# EAGLE board MicrocontrollerV2 (EAGLE 9.5.1)
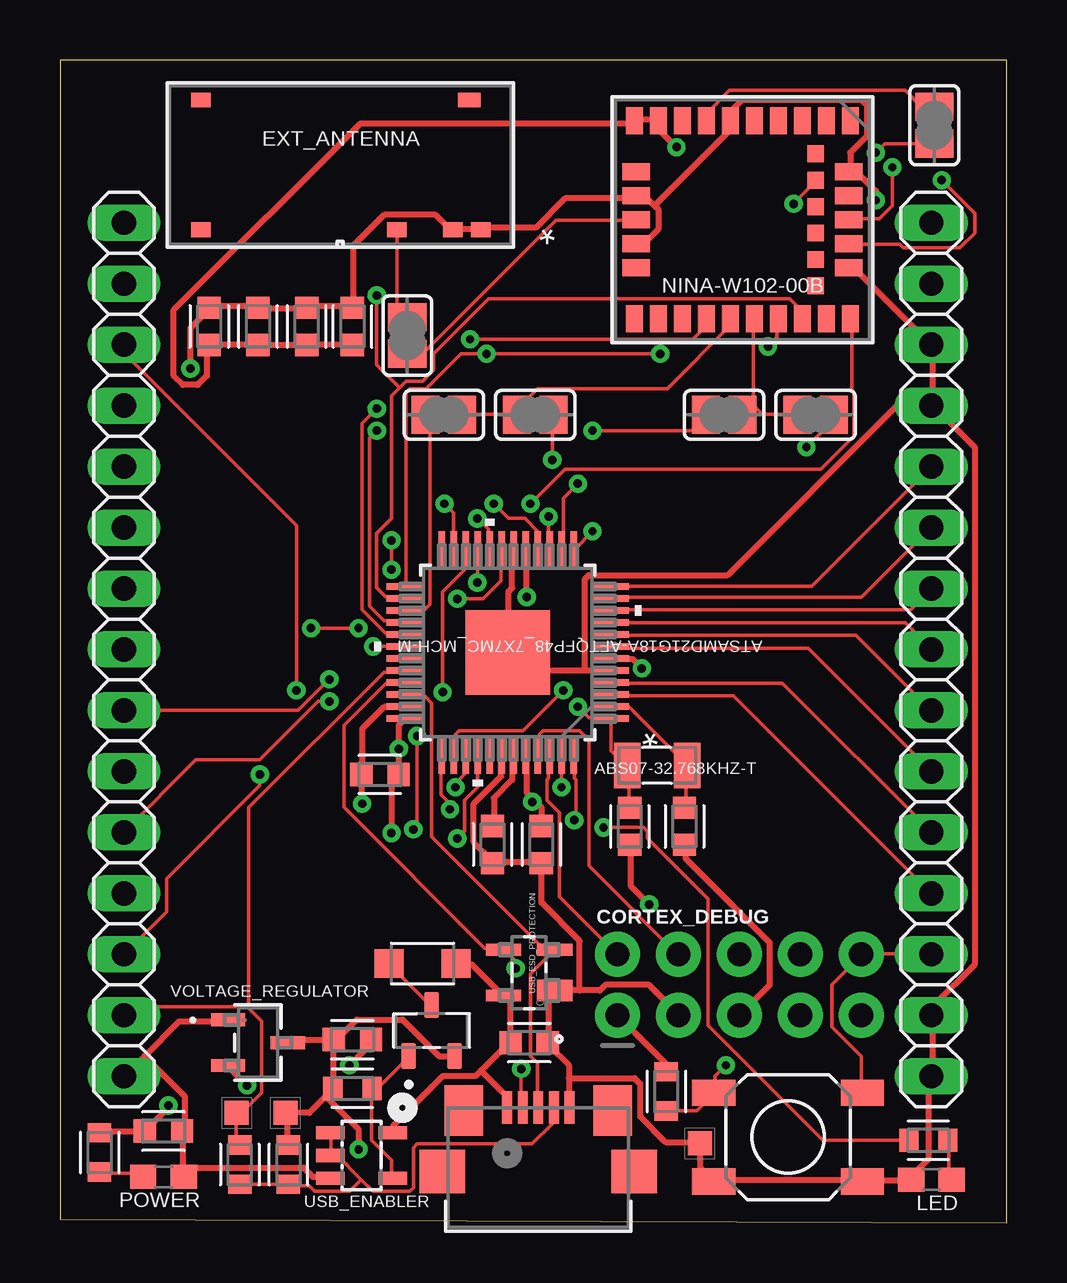
[diagram p0: board, top side]
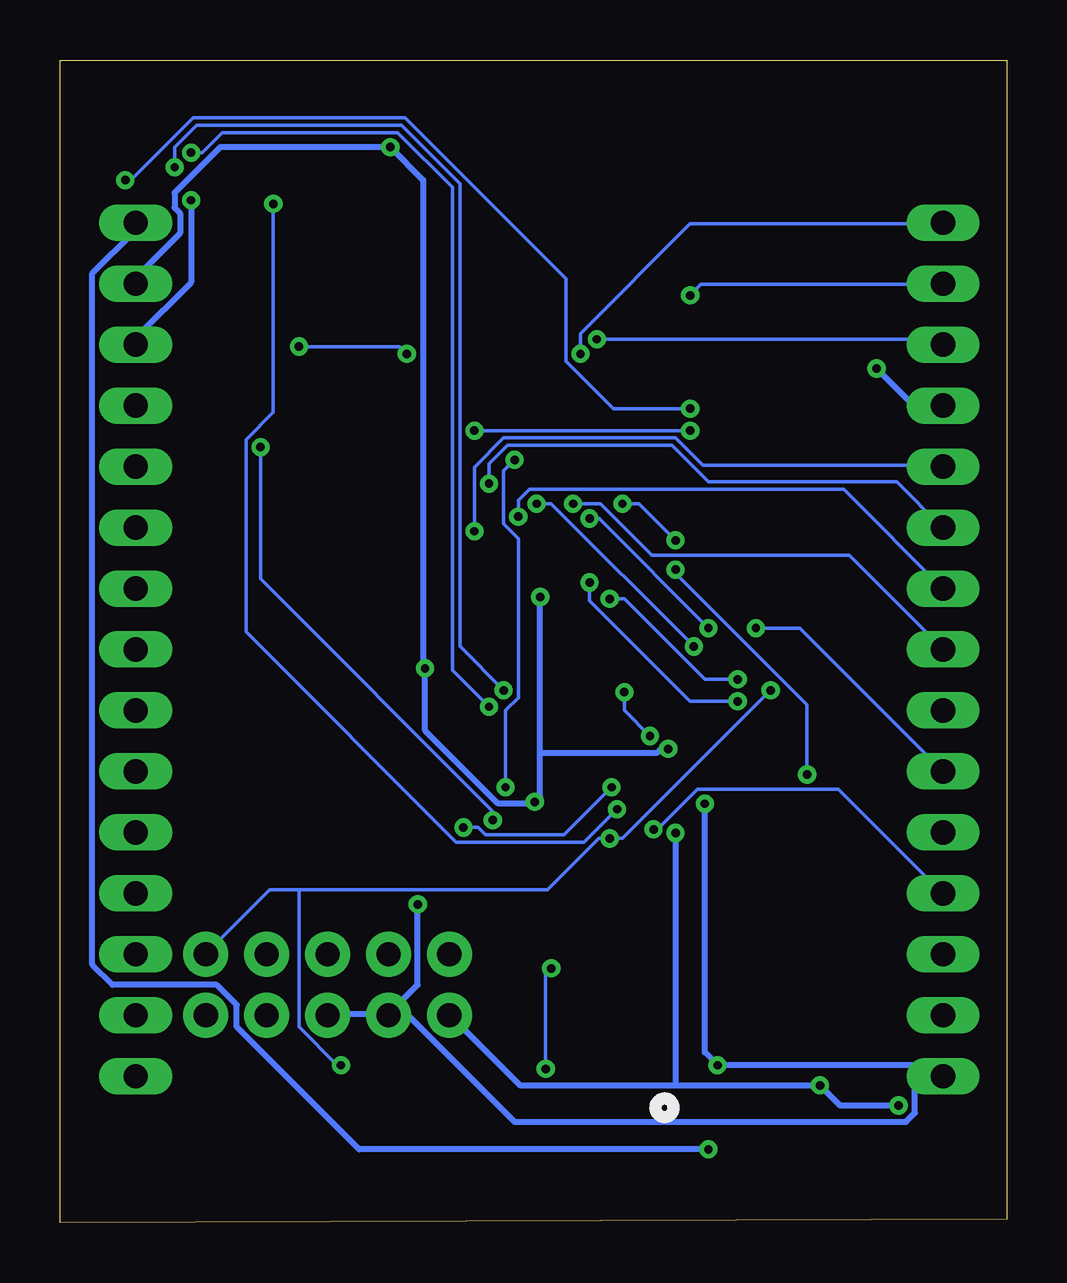
[diagram p1: board, bottom side, seen from below]

Size 39.48 x 48.44 mm. Coordinates in mm from the lower left corner, seen from the top.
Outline: 0,0.13 39.48,0 39.48,48.44 0,48.44 0,0.13
Copper layers (1*16): Top 0.035mm / dielectric 1.5mm / Bottom 0.035mm
Design rules "default": minimum track width 6mil, minimum drill 0.35mm, track to track 6mil, track to pad 6mil, pad to pad 6mil, via to via 6mil, smd to smd 6mil, copper to edge 40mil, drill to drill 6mil, minimum pad ring 10mil, minimum via ring 8mil, stop-mask expansion 4mil, vias tented up to drill 0mil, thermal gap 10mil
Net classes: 1 Supply: width 0.254 mm

## Footprints (pad centres in the part's own frame; a part is rotated, then mirrored left to right if it is on the bottom)
ABS07-32.768KHZ-T = smd 1.1 x 1.9: 1 -1.25,0; 2 1.25,0
CAPC1608X85 = smd 0.921 x 0.97: 1 -0.775,0; 2 0.775,0
2X5_NOSILK = drill 1.016 pad 1.88: 1 0,0; 2 0,2.54; 3 2.54,0; 4 2.54,2.54; 5 5.08,0; 6 5.08,2.54; 7 7.62,0; 8 7.62,2.54; 9 10.16,0; 10 10.16,2.54
SOD123W = smd 1.2 x 1.2: 1 -1.4,0; 2 1.4,0
PRO-OB-536_PAB = smd 0.813 x 0.61: 1 -5.85,2.702; 2 -4.7,2.702; 3 -2.36,2.702; 4 5.8,2.702; 5 5.8,-2.698 | smd 0.94 x 0.61: 6 -5.385,-2.698
TESTPOINT_SMD-10SN = smd 1 x 1: TP 0,0
1X15 = drill 1.016 long: 1 -17.78,0; 2 -15.24,0; 3 -12.7,0; 4 -10.16,0; 5 -7.62,0; 6 -5.08,0; 7 -2.54,0; 8 0,0; 9 2.54,0; 10 5.08,0; 11 7.62,0; 12 10.16,0; 13 12.7,0; 14 15.24,0; 15 17.78,0
0603 = smd 1.1 x 1: 1 -0.85,0; 2 0.85,0
CONN5_ZX62-AB-5PA_HIR = smd 0.406 x 1.346: 1 -1.3,2.502; 2 -0.65,2.502; 3 0,2.502; 4 0.65,2.502; 5 1.3,2.502 | smd 1.6 x 2.108: 6 -3.099,2.375; 7 3.099,2.375 | smd 1.905 x 1.803: 8 -4,-0.165; 9 4,-0.165
SOT96P240X110-3N = smd 1.09 x 0.61: 1 -1.07,0.96; 2 -1.07,-0.96; 3 1.07,0
RESC1608X60 = smd 0.799 x 0.974: 1 -0.815,0; 2 0.815,0
SM08 = smd 1.8 x 1.1: 1 -3.1,1.85; 2 3.1,1.85; 3 -3.1,-1.85; 4 3.1,-1.85
SJ = smd 1.168 x 1.6: 1 -0.762,0; 2 0.762,0
TQFP48_7X7MC_MCH-M = smd 1.549 x 0.279: 1 -4.28,2.75; 2 -4.28,2.25; 3 -4.28,1.75; 4 -4.28,1.25; 5 -4.28,0.75; 6 -4.28,0.25; 7 -4.28,-0.25; 8 -4.28,-0.75; 9 -4.28,-1.25; 10 -4.28,-1.75; 11 -4.28,-2.25; 12 -4.28,-2.75; 25 4.28,-2.75; 26 4.28,-2.25; 27 4.28,-1.75; 28 4.28,-1.25; 29 4.28,-0.75; 30 4.28,-0.25; 31 4.28,0.25; 32 4.28,0.75; 33 4.28,1.25; 34 4.28,1.75; 35 4.28,2.25; 36 4.28,2.75 | smd 0.279 x 1.549: 13 -2.75,-4.28; 14 -2.25,-4.28; 15 -1.75,-4.28; 16 -1.25,-4.28; 17 -0.75,-4.28; 18 -0.25,-4.28; 19 0.25,-4.28; 20 0.75,-4.28; 21 1.25,-4.28; 22 1.75,-4.28; 23 2.25,-4.28; 24 2.75,-4.28; 37 2.75,4.28; 38 2.25,4.28; 39 1.75,4.28; 40 1.25,4.28; 41 0.75,4.28; 42 0.25,4.28; 43 -0.25,4.28; 44 -0.75,4.28; 45 -1.25,4.28; 46 -1.75,4.28; 47 -2.25,4.28; 48 -2.75,4.28 | smd 3.505 x 3.505: EPAD 0,0
QFN_W151-00B_UBL = smd 1.143 x 0.711: 1 -4.125,4.5; 2 -4.125,3.5; 3 -4.125,2.5; 4 -4.125,1.5; 5 -4.125,0.5; 6 -4.125,-0.5; 7 -4.125,-1.5; 8 -4.125,-2.5; 9 -4.125,-3.5; 10 -4.125,-4.5; 16 4.125,-4.5; 17 4.125,-3.5; 18 4.125,-2.5; 19 4.125,-1.5; 20 4.125,-0.5; 21 4.125,0.5; 22 4.125,1.5; 23 4.125,2.5; 24 4.125,3.5; 25 4.125,4.5 | smd 0.711 x 1.143: 11 -2,-4.425; 12 -1,-4.425; 13 0,-4.425; 14 1,-4.425; 15 2,-4.425; 26 2,4.425; 27 1,4.425; 28 0,4.425; 29 -1,4.425; 30 -2,4.425 | smd 0.701 x 0.701: 31 -2.746,3.055; 32 -1.646,3.055; 33 -0.546,3.055; 34 0.554,3.055; 35 1.654,3.055; 36 2.754,3.055
SOT23-5L = smd 0.55 x 1.2: 1 -0.95,-1.3; 2 0,-1.3; 3 0.95,-1.3; 4 0.95,1.3; 5 -0.95,1.3
SOT143B_NEX-M = smd 0.889 x 1.473: 1 -0.747,-1.067 | smd 0.483 x 1.473: 2 0.95,-1.067; 3 0.95,1.067; 4 -0.95,1.067
SOT-23_TOR-M = smd 0.533 x 1.422: 1 -0.95,-1.245; 2 0.95,-1.245; 3 0,1.245

## Placement (x,y rotation side)
ABS07-32.768KHZ-T  32.768KHz  [ABS07-32.768KHZ-T]  24.89,19.05 180 top
C1  4.7uF  [CAPC1608X85]  19.56,7.49 0 top
C4  10uF  [CAPC1608X85]  12.19,7.62 180 top
C5  10uF  [CAPC1608X85]  4.32,3.81 0 top
C10  100nF  [CAPC1608X85]  10.29,37.34 270 top
C11  12pF  [CAPC1608X85]  23.75,16.51 90 top
C12  12pF  [CAPC1608X85]  26.04,16.51 90 top
C13  1uF  [CAPC1608X85]  18.03,15.75 90 top
C14  100nF  [CAPC1608X85]  20.07,15.75 90 top
C15  100nF  [CAPC1608X85]  13.33,18.67 0 top
C16  100nF  [CAPC1608X85]  6.22,37.34 90 top
C17  100nF  [CAPC1608X85]  8.25,37.34 270 top
C18  4.7uF  [CAPC1608X85]  12.19,37.34 270 top
CORTEX_DEBUG  [2X5_NOSILK]  23.24,8.64 0 top
D1  PMEG6020ER  [SOD123W]  15.11,10.8 0 top
EXT_ANTENNA  PRO-OB-536  [PRO-OB-536_PAB]  11.68,44.07 180 top
GND  TESTPOINT_TPS-SMD-10SN  [TESTPOINT_SMD-10SN]  26.67,3.3 0 top
JP1  [1X15]  36.32,23.88 270 top
JP2  [1X15]  2.67,23.88 270 top
LED  HSMR-C190  [0603]  36.32,1.78 0 top
MICRO-USB  ZX62-AB-5PA(31)  [CONN5_ZX62-AB-5PA_HIR]  19.94,2.29 0 top
POWER  HSMR-C190  [0603]  4.32,1.91 180 top
Q1  DMG2307L  [SOT96P240X110-3N]  15.49,8 90 top
R1  100K  [RESC1608X60]  9.52,2.41 270 top
R2  330  [RESC1608X60]  7.49,2.41 90 top
R3  47k  [RESC1608X60]  12.19,5.59 0 top
R4  330  [RESC1608X60]  1.65,2.92 90 top
R5  330  [RESC1608X60]  36.2,3.43 180 top
R7  10K  [RESC1608X60]  25.27,5.46 90 top
S1  [SM08]  30.35,3.56 0 top
SJ1  [SJ]  14.48,36.96 90 top
SJ2  [SJ]  36.45,45.72 90 top
SJ3  [SJ]  27.69,33.65 0 top
SJ4  [SJ]  16,33.65 0 top
SJ5  [SJ]  31.5,33.65 180 top
SJ6  [SJ]  19.81,33.65 180 top
U1  ATSAMD21G18A-AFTQFP48_7X7MC_MCH-M  [TQFP48_7X7MC_MCH-M]  18.67,23.75 180 top
U2  NINA-W102-00B  [QFN_W151-00B_UBL]  28.45,41.78 270 top
USB_EN  TESTPOINT_TPS-SMD-10SN  [TESTPOINT_SMD-10SN]  7.37,4.57 0 top
USB_ENABLER  74AHC1G125  [SOT23-5L]  12.57,2.79 270 top
USB_ESD_PROTECTION  PRTR5V0U2XSOT143B_NEX-M  [SOT143B_NEX-M]  19.56,10.41 90 top
VIN  TESTPOINT_TPS-SMD-10SN  [TESTPOINT_SMD-10SN]  9.4,4.57 0 top
VOLTAGE_REGULATOR  XC6206P332MR-GSOT-23_TOR-M  [SOT-23_TOR-M]  8.25,7.49 270 top

## Library data of the parts
ABS07-32.768KHZ-T = Crystals; CREATED_BY: PCBLayout.com; DIGIKEY_PART_NUMBER: 535-9542-2-ND; MANUFACTURER: Abracon LLC; MPN: ABS07-32.768KHZ-T; PACKAGE: SMD-2
C1 C4 C5 C10-C18 = Capacitor; CATEGORY: Capacitor
CORTEX_DEBUG = SparkFun-Connectors
D1 = nxp_60_1_1
EXT_ANTENNA = PRO-OB-536 [SMD Antenna]; BUILT_BY: EMA_Cory; COPYRIGHT: Copyright (C) 2018 Accelerated Designs. All rights reserved; MANUFACTURER_PART_NUMBER: PRO-OB-536; SOURCELIBRARY: Proant_2019-12-18; VENDOR: PROANT AB
GND USB_EN VIN = 52101-101-REV-A; BOM: EXCLUDE
JP1 JP2 = adafruit
LED POWER = HSMR-C190; AVAILABILITY: Unavailable; DESCRIPTION: Blue 473nm LED Indication - Discrete 3.4V 0603 (1608 Metric); MF: Broadcom Limited; MP: HSMR-C190; PACKAGE: 0603 Broadcom; PRICE: None
MICRO-USB = ZX62-AB-5PA(31) [Micro-USB 2.0]; BUILT_BY: EMA_Justin; COPYRIGHT: Copyright (C) 2016 Accelerated Designs. All rights reserved; MANUFACTURER_PART_NUMBER: ZX62-AB-5PA(31); SOURCELIBRARY: Hirose_2018-12-15; VENDOR: Hirose
Q1 = DMG2307L; AVAILABILITY: Unavailable; DESCRIPTION: P-Channel 30V 2.5A (Ta) 760mW (Ta) Surface Mount SOT-23; MF: Diodes Inc.; MP: DMG2307L; PACKAGE: SOT-23-3 Diodes Inc.; PRICE: None
R1-R5 R7 = Resistor; CATEGORY: Resistor; SUB-CATEGORY: Fixed
S1 = pts525_10 [reset switch]; MF: C&K Components; MPN: PTS525SK08SMTRLFS; OC_FARNELL: unknown; OC_NEWARK: unknown
SJ1-SJ6 = jumper
U1 = ATSAMD21G18A-AF; BUILT_BY: EMA_Molly; COPYRIGHT: Copyright (C) 2018 Accelerated Designs. All rights reserved; MANUFACTURER_PART_NUMBER: ATSAMD21G18A-AF; SOURCELIBRARY: Microchip_2019-08-23_25; VENDOR: Microchip
U2 = NINA-W102; BUILT_BY: EMA_Matt; COPYRIGHT: Copyright (C) 2018 Accelerated Designs. All rights reserved; DATASHEET: https://www.u-blox.com/sites/default/files/NINA-W15_DataSheet_%28UBX-18006647%29.pdf; MANUFACTURER_PART_NUMBER: NINA-W102-00B; SOURCELIBRARY: Ublox_2020-01-16; VENDOR: Ublox
USB_ENABLER = 74AHC1G125; AVAILABILITY: Unavailable; DESCRIPTION: Buffer, Non-Inverting 1 Element 1 Bit per Element 3-State Output SOT-23-5; MF: Texas Instruments; MP: 74AHC1G125; PACKAGE: SOT-23 Texas Instruments; PRICE: None
USB_ESD_PROTECTION = PRTR5V0U2X; COPYRIGHT: Copyright (C) 2016 Accelerated Designs. All rights reserved; MANUFACTURER_PART_NUMBER: PRTR5V0U2X; SOURCELIBRARY: Nexperia_2018-05-2018; VENDOR: Nexperia
VOLTAGE_REGULATOR = XC6206P332MR (SOT-23) [Vin to 3.3V]; BUILT_BY: EMA_UL_Team; MANUFACTURER_PART_NUMBER: XC6206P332MR-G; SOURCELIBRARY: Torex_2016-07-05_2; VENDOR: Torex Semiconductor

## Nets
3V3+ [Supply]: C5.1 C10.2 C14.2 C15.2 C16.1 C17.2 C18.2 CORTEX_DEBUG.1 JP1.2 R4.2 R7.2 U1.6 U1.17 U1.36 U1.44 U2.9 U2.10 VOLTAGE_REGULATOR.2
25_BOOT_MODE: U1.30 U2.25
27_BOOT_MODE: U1.29 U2.27
28_TIMING_OUT: U1.38 U2.28
32_TIMING_IN: U1.37 U2.32
A0: JP1.12 U1.3
A1: JP1.11 U1.4
A2: JP1.10 U1.7
A3: JP1.9 U1.8
A4: JP1.8 U1.9
A5: JP1.7 U1.10
A6: JP1.6 U1.11
A7: JP1.5 U1.12
ANT: EXT_ANTENNA.3 SJ1.2
D0: JP2.5 U1.13
D1: JP2.6 U1.14
D2: JP2.7 U1.15
D3: JP2.8 U1.16
D4: JP2.9 U1.19
D5: JP2.10 U1.20
D6: JP2.11 U1.21
D7: JP2.12 U1.22
D8: JP2.13 U1.23
EXT_ANT: SJ1.1 U2.13
EXT_OSC: SJ2.2 U2.7
GND [Supply]: C1.2 C4.1 C5.2 C10.1 C11.1 C12.1 C13.1 C14.1 C15.1 C16.2 C17.1 C18.1 CORTEX_DEBUG.3 CORTEX_DEBUG.5 EXT_ANTENNA.1 EXT_ANTENNA.2 GND.TP JP1.3 JP1.4 JP1.14 JP1.15 JP2.4 JP2.15 LED.1 MICRO-USB.5 POWER.1 S1.3 S1.4 U1.5 U1.18 U1.35 U1.42 U1.EPAD U2.6 U2.12 U2.14 U2.26 U2.30 USB_ENABLER.3 USB_ESD_PROTECTION.1 VOLTAGE_REGULATOR.1
LED: R5.2 U1.39
N$1: LED.2 R5.1
N$3: POWER.2 R4.1
N$6: D1.1 Q1.3
N$8: Q1.1 R3.2 USB_ENABLER.4
PA00: ABS07-32.768KHZ-T.2 C11.2 SJ2.1 U1.1
PA01: ABS07-32.768KHZ-T.1 C12.2 U1.2
RESETN: CORTEX_DEBUG.10 JP1.13 JP2.3 R7.1 S1.1 S1.2 U1.40 U2.19
SWCLK: CORTEX_DEBUG.4 U1.45
SWDIO: CORTEX_DEBUG.2 U1.46
UART_CTS: SJ3.2 SJ5.2 U2.21
UART_CTS_A: SJ5.1 U1.48
UART_CTS_D: SJ3.1 U1.28
UART_RTS: SJ4.2 SJ6.2 U2.20
UART_RTS_A: SJ6.1 U1.47
UART_RTS_D: SJ4.1 U1.27
UART_RX: JP2.2 U1.26 U2.23
UART_TX: JP2.1 U1.25 U2.22
USB_EN: JP2.14 R2.2 U1.32 USB_EN.TP
USB_ID: MICRO-USB.4 R1.2 R2.1 USB_ENABLER.1 USB_ENABLER.2
USB_N: MICRO-USB.2 U1.33 USB_ESD_PROTECTION.3
USB_P: MICRO-USB.3 U1.34 USB_ESD_PROTECTION.2
VBUS [Supply]: C1.1 D1.2 MICRO-USB.1 USB_ENABLER.5 USB_ESD_PROTECTION.4
VDDCORE [Supply]: C13.2 U1.43
VIN [Supply]: C4.2 JP1.1 Q1.2 R1.1 R3.1 VIN.TP VOLTAGE_REGULATOR.3

## Tracks (layer width: path | path; a pad name or v marks a point on that pad's centre or on a via)
3V3+  (via drill 0.35)
  Top 0.254: R4.2 1.7,3.81 C5.1 3.61,3.89 4.52,4.8 v4.52,4.88 | CORTEX_DEBUG.1 25.25,6.63 25.25,6.33 R7.2 | v7.8,5.72 7.04,6.48 VOLTAGE_REGULATOR.2 | U1.36 14.35,20.96 14.12,20.73 v14.12,19.74 C15.2 14.05,18.59 13.82,18.36 v13.82,16.23 | C14.2 20.07,17.3 19.76,17.6 | 19.76,17.6 19.46,17.91 19.46,19.43 U1.44 | v24.26,23.09 23.88,23.47 22.96,23.47 U1.6 | v19.69,17.53 19.76,17.6 | v19.46,26.06 19.46,27.96 U1.17 | C18.2 12.14,36.58 10.31,36.58 C10.2 10.16,36.58 8.33,36.58 C17.2 6.27,36.58 C16.1 6.12,36.5 6.12,35.28 5.74,34.9 5.13,34.9 4.75,35.28 4.75,38.02 12.52,45.8 23.88,45.8 U2.10 23.95,45.95 24.94,45.95 U2.9 25.02,45.8 25.02,45.49 v25.71,44.81
  Bottom 0.254: 13.82,5.72 20.3,5.72 23.19,8.61 CORTEX_DEBUG.1 | 13.82,5.72 v7.8,5.72 6.96,4.88 v4.52,4.88 | 19.46,19.58 19.46,17.76 v19.69,17.53 19.76,17.45 21.21,17.45 24.26,20.5 v24.26,23.09 24.33,23.16 24.33,43.43 v25.71,44.81 32.79,44.81 34.7,42.9 34.7,42.29 34.47,42.06 34.47,41.22 36.3,39.39 36.3,39.17 JP1.2 | 19.46,19.58 v19.46,26.06 | v14.12,19.74 14.43,19.74 14.58,19.58 19.46,19.58 | v13.82,16.23 13.82,5.72
25_BOOT_MODE  (via drill 0.35)
  Top 0.152: v19.61,29.95 21.06,31.39 31.73,31.39 33.1,32.77 33.1,34.59 33.02,34.67 33.02,37.64 U2.25 | v13.06,24 14.35,24 U1.30
  Bottom 0.152: v19.61,29.95 19,29.95 v13.06,24
27_BOOT_MODE  (via drill 0.35)
  Top 0.152: v36.75,43.43 38.12,42.06 38.12,41.22 37.52,40.61 35.15,40.61 35,40.77 32.94,40.77 U2.27 | v13.21,33.91 12.6,33.3 12.6,25.53 13.59,24.54 14.35,24.54 U1.29
  Bottom 0.152: v36.75,43.43 36.52,43.43 33.93,46.02 25.1,46.02 18.39,39.32 18.39,35.89 16.41,33.91 v13.21,33.91
28_TIMING_OUT  (via drill 0.35)
  Top 0.152: v34.7,43.97 34.7,42.37 34.16,41.83 32.94,41.83 U2.28 | v20.98,22.17 19.3,20.5 16.64,20.5 16.48,20.35 16.48,19.51 U1.38
  Bottom 0.152: v34.7,43.97 34.7,44.81 33.78,45.72 25.25,45.72 22.81,43.28 22.81,24 v20.98,22.17
32_TIMING_IN  (via drill 0.35)
  Top 0.152: v30.58,42.44 31.5,43.36 U2.32 | v16.26,17.22 16.26,17.45 15.87,17.83 15.87,19.43 U1.37
  Bottom 0.152: v30.58,42.44 30.58,33.76 31.73,32.61 31.73,24.61 22.96,15.85 17.63,15.85 v16.26,17.22
A0
  Top 0.152: U1.3 22.96,21.95 28.07,21.95 36.3,13.72 JP1.12
A1
  Top 0.152: U1.4 22.96,22.48 30.12,22.48 36.3,16.31 JP1.11
A2
  Top 0.152: JP1.10 31.19,23.93 22.96,23.93 U1.7
A3
  Top 0.152: U1.8 22.96,24.46 33.17,24.46 36.3,21.34 JP1.9
A4
  Top 0.152: U1.9 35.23,24.99 36.3,23.93 JP1.8
A5
  Top 0.152: U1.10 22.96,25.53 35.46,25.53 36.3,26.37 JP1.7
A6
  Top 0.152: U1.11 22.96,26.06 33.4,26.06 36.3,28.96 JP1.6
A7
  Top 0.152: JP1.5 31.34,26.52 22.96,26.52 U1.12
ANT
  Top 0.152: EXT_ANTENNA.3 14.05,41.3 14.05,38.1 14.43,37.72 SJ1.2
D0  (via drill 0.35)
  Top 0.152: v22.2,28.8 21.44,28.04 U1.13
  Bottom 0.152: v22.2,28.8 22.2,31.47 20.98,32.69 13.82,32.69 12.67,31.55 2.69,31.55 JP2.5
D1  (via drill 0.35)
  Top 0.152: v21.59,30.79 20.98,30.18 20.98,28.04 U1.14
  Bottom 0.152: v21.59,30.79 21.59,31.62 20.83,32.38 13.97,32.38 12.45,30.86 4.6,30.86 2.69,28.96 JP2.6
D2  (via drill 0.35)
  Top 0.152: v20.37,29.41 20.37,28.04 U1.15
  Bottom 0.152: v20.37,29.41 20.37,30.1 19.91,30.56 6.81,30.56 JP2.7
D3  (via drill 0.35)
  Top 0.152: v18.09,29.95 18.69,29.34 19.38,29.34 19.91,28.8 19.91,28.04 U1.16
  Bottom 0.152: v18.09,29.95 16.94,29.95 14.81,27.81 6.58,27.81 2.69,23.93 JP2.8
D4  (via drill 0.35)
  Top 0.152: v16.56,25.98 17.63,25.98 18.39,26.75 18.39,27.96 U1.19 | v11.23,22.63 9.93,21.34 JP2.9
  Bottom 0.152: v16.56,25.98 15.95,25.98 12.6,22.63 v11.23,22.63
D5  (via drill 0.35)
  Top 0.152: v17.4,29.34 17.86,28.88 17.86,28.04 U1.20 | v10.46,24.77 v12.45,24.77
  Bottom 0.152: v17.4,29.34 17.02,29.34 v12.45,24.77 | v10.46,24.77 8.64,24.77 JP2.10
D6  (via drill 0.35)
  Top 0.152: v17.4,26.67 17.4,27.96 U1.21 | v11.23,21.72 10.77,21.72 8.33,19.28 5.66,19.28 2.69,16.31 JP2.11
  Bottom 0.152: v17.4,26.67 17.4,25.91 13.21,21.72 v11.23,21.72
D7  (via drill 0.35)
  Top 0.152: v15.95,22.1 15.95,26.29 16.87,27.2 16.87,27.96 U1.22 | v14.88,20.27 14.88,16.54 v14.73,16.38
  Bottom 0.152: v15.95,22.1 15.95,21.34 v14.88,20.27 | v14.73,16.38 14.58,16.38 12.9,18.06 7.04,18.06 2.69,13.72 JP2.12
D8  (via drill 0.35)
  Top 0.152: v16.03,29.95 16.41,29.57 16.41,28.04 U1.23 | v13.82,27.2 v13.82,28.42 | v8.33,18.67 8.33,18.21 4.45,14.33 4.45,12.95 JP2.13
  Bottom 0.152: v16.03,29.95 15.34,29.95 v13.82,28.42 | v13.82,27.2 13.82,27.05 8.33,21.57 v8.33,18.67
EXT_ANT
  Top 0.152: SJ1.1 15.11,36.2 20.68,41.76 23.95,41.76 U2.13
EXT_OSC
  Top 0.152: U2.7 27,45.95 27,46.25 27.92,47.17 35.23,47.17 35.92,46.48 SJ2.2
GND  (via drill 0.35)
  Top 0.254: USB_ENABLER.3 11.23,1.91 10.54,1.91 10.16,2.29 5.21,2.29 POWER.1 5.13,1.91 5.13,3.81 C5.2 5.21,3.89 5.21,5.26 3.53,6.93 | U1.35 14.35,21.49 13.51,21.49 12.6,20.57 12.6,18.67 C15.1 12.6,18.59 v12.6,17.45 | v12.06,6.55 12.9,7.39 12.9,7.62 C4.1 | 3.53,6.93 2.69,6.1 JP2.15 | 3.53,6.93 4.98,8.38 6.96,8.38 VOLTAGE_REGULATOR.1 | CORTEX_DEBUG.5 29.59,9.91 29.59,11.66 26.09,15.16 26.09,15.7 C12.1 | U1.42 18.39,19.43 18.39,18.59 17.25,17.45 17.25,15.85 18.01,15.09 C13.1 18.09,15.01 20.07,15.01 C14.1 20.07,13.34 21.67,11.73 21.67,9.68 | 21.21,6.02 21.21,6.55 20.37,7.39 C1.2 20.37,7.54 20.37,9.37 20.6,9.6 USB_ESD_PROTECTION.1 20.75,9.68 21.67,9.68 | 21.21,6.02 21.21,4.8 MICRO-USB.5 | v24.56,13.26 23.8,14.02 23.8,15.7 C11.1 | 21.67,9.68 22.5,9.68 22.73,9.91 24.56,9.91 25.78,8.69 CORTEX_DEBUG.3 | 21.21,6.02 23.95,6.02 24.18,5.79 24.18,4.42 25.25,3.35 26.62,3.35 GND.TP 26.7,3.28 26.7,2.29 27.23,1.75 S1.3 27.3,1.75 33.4,1.75 S1.4 33.48,1.75 35.46,1.75 LED.1 35.46,1.91 36.22,2.67 36.22,6.02 JP1.15 36.37,6.1 36.37,8.61 JP1.14 36.45,8.69 36.45,9.07 38.12,10.74 38.12,32.31 36.45,33.98 JP1.4 | U2.26 32.94,39.78 33.1,39.78 36.3,36.58 JP1.3 36.37,36.5 36.37,34.06 JP1.4 | U1.18 18.85,27.96 18.85,26.44 18.69,26.29 18.69,23.77 U1.EPAD 18.77,23.7 19.46,23.01 21.89,23.01 | 21.89,23.01 22.89,23.01 U1.5 | 21.89,23.01 21.89,26.82 22.05,26.98 27.84,26.98 34.85,33.98 36.22,33.98 JP1.4 | 24.79,42.37 24.41,42.75 24.03,42.75 U2.12 23.95,42.67 21.06,42.67 19.84,41.45 17.63,41.45 EXT_ANTENNA.1 17.48,41.38 16.41,41.38 EXT_ANTENNA.2 16.26,41.38 15.65,41.99 13.51,41.99 12.22,40.69 12.22,38.25 C18.1 12.14,38.18 10.31,38.18 C10.1 10.16,38.1 8.33,38.1 C17.1 8.25,38.18 6.27,38.18 C16.2 6.2,38.02 5.44,37.26 v5.44,35.58
  Top 0.254: 24.79,42.37 24.94,42.21 24.94,41.38 24.41,40.84 24.03,40.84 U2.14 | 24.79,42.37 27.92,45.49 27.92,45.87 U2.6 27.99,46.02 27.99,46.33 28.45,46.79 33.4,46.79 33.63,46.56 33.63,45.26 32.94,44.58 32.94,43.81 U2.30 33.02,43.74 33.25,43.74 34.01,42.98 v34.01,42.6
  Bottom 0.254: v12.6,17.45 12.6,7.09 v12.06,6.55 3.15,6.55 2.69,6.1 JP2.15 3.83,6.48 3.83,4.57 4.22,4.19 20.52,4.19 25.32,8.99 CORTEX_DEBUG.3 | v24.56,13.26 24.56,9.91 25.78,8.69 CORTEX_DEBUG.3 | CORTEX_DEBUG.5 28.3,8.69 25.86,8.69 CORTEX_DEBUG.3 | v5.44,35.58 3.91,34.06 2.69,34.06 JP2.4 | v34.01,42.6 34.01,39.17 36.3,36.88 36.3,36.58 JP1.3
LED  (via drill 0.35)
  Top 0.152: R5.2 31.8,3.43 27,8.23 27,13.49 24.49,16 24.49,16.31 24.33,16.46 v22.66,16.46 | v16.48,18.14 16.48,18.29 16.87,18.67 16.87,19.43 U1.39
  Bottom 0.152: v22.66,16.46 22.05,16.46 21.74,16.15 18.47,16.15 v16.48,18.14
N$1
  Top 0.152: R5.1 37.06,3.43 37.06,1.91 37.13,1.83 LED.2
N$3
  Top 0.152: R4.1 1.7,2.06 3.3,2.06 3.45,1.91 POWER.2
N$6
  Top 0.152: Q1.3 15.49,9.14 15.34,9.14 13.74,10.74 D1.1
N$8
  Top 0.152: Q1.1 14.5,6.86 13.28,5.64 13.06,5.64 R3.2 12.98,5.56 12.98,3.43 13.82,2.59 13.82,1.91 USB_ENABLER.4
PA00  (via drill 0.35)
  Top 0.152: C11.2 23.72,17.3 23.72,18.97 ABS07-32.768KHZ-T.2 23.57,19.05 22.96,19.66 22.96,20.96 U1.1 22.89,21.03 22.05,21.03 v21.59,21.49 | SJ2.1 34.39,44.96 v34.01,44.58
  Bottom 0.152: v34.01,44.58 33.55,44.58 32.71,45.41 25.4,45.41 23.11,43.13 23.11,23.01 v21.59,21.49
PA01
  Top 0.152: C12.2 26.09,17.3 26.09,19.05 ABS07-32.768KHZ-T.1 26.16,19.05 23.72,21.49 U1.2
RESETN  (via drill 0.35)
  Top 0.152: v17.09,36.8 26.39,36.8 26.92,37.34 26.92,37.64 U2.19 | R7.1 25.32,4.65 26.54,4.65 27.23,5.33 S1.1 27.3,5.41 27.3,6.1 v27.76,6.55 | v16.56,16 16.87,16.31 16.87,17.6 17.4,18.14 17.4,19.43 U1.40 | S1.2 33.4,5.41 33.4,6.93 32.18,8.15 32.18,9.91 33.4,11.12 CORTEX_DEBUG.10 33.4,11.2 36.3,11.2 JP1.13 | v9.85,22.17 9.85,29.03 2.69,36.2 2.69,36.58 JP2.3
  Bottom 0.152: v17.09,36.8 2.92,36.8 2.69,36.58 JP2.3 | 29.52,13.87 30.73,13.87 33.4,11.2 CORTEX_DEBUG.10 | 29.52,13.87 19.15,13.87 17.02,16 v16.56,16 16.03,16 v9.85,22.17 | v27.76,6.55 27.92,6.55 29.52,8.15 29.52,13.87
SWCLK
  Top 0.152: U1.45 19.99,19.51 19.99,20.35 20.14,20.5 21.67,20.5 22.05,20.12 22.05,14.86 25.78,11.12 CORTEX_DEBUG.4
SWDIO
  Top 0.152: U1.46 20.37,19.43 20.37,18.52 20.3,18.44 20.3,17.6 20.83,17.07 20.83,13.56 23.19,11.2 CORTEX_DEBUG.2
UART_CTS
  Top 0.152: U2.21 28.91,37.64 28.91,34.14 28.45,33.68 SJ3.2 28.91,34.06 29.29,33.68 30.73,33.68 SJ5.2
UART_CTS_A  (via drill 0.35)
  Top 0.152: v21.44,16.76 21.51,16.84 21.51,18.44 21.44,18.52 21.44,19.43 U1.48 | v31.12,32.31 32.26,33.45 SJ5.1
  Bottom 0.152: v21.44,16.76 21.44,17.14 31.12,26.82 v31.12,32.31
UART_CTS_D  (via drill 0.35)
  Top 0.152: v13.21,32.99 12.9,32.69 12.9,25.68 13.51,25.07 14.35,25.07 U1.28 | v22.2,32.99 26.31,32.99 26.92,33.6 SJ3.1
  Bottom 0.152: v22.2,32.99 v13.21,32.99
UART_RTS
  Top 0.152: U2.20 27.92,37.64 27.92,37.34 25.32,34.75 19.91,34.75 19.08,33.91 19.08,33.68 SJ6.2 19,33.68 16.79,33.68 SJ4.2
UART_RTS_A  (via drill 0.35)
  Top 0.152: v20.9,18.14 20.9,19.43 U1.47 | v20.52,31.78 20.52,33.6 SJ6.1
  Bottom 0.152: v20.9,18.14 20.9,21.34 20.37,21.87 20.37,28.5 20.98,29.11 20.98,31.32 v20.52,31.78
UART_RTS_D
  Top 0.152: U1.27 14.43,25.53 15.19,25.53 15.42,25.76 15.42,33.45 15.26,33.6 SJ4.1
UART_RX  (via drill 0.35)
  Top 0.152: 14.16,34.78 13.82,34.44 13.82,29.34 13.21,28.73 13.21,26.44 13.59,26.06 14.35,26.06 U1.26 | 14.16,34.78 14.43,35.05 15.11,35.05 15.57,35.51 15.57,36.2 17.86,38.48 30.43,38.48 30.89,38.02 30.89,37.72 U2.23 | v13.21,38.63 13.21,35.74 14.16,34.78
  Bottom 0.152: v13.21,38.63 12.75,39.09 2.69,39.09 JP2.2
UART_TX  (via drill 0.35)
  Top 0.152: v29.52,36.5 29.9,36.88 29.9,37.64 U2.22 | v25.02,36.2 v17.78,36.2 16.71,36.2 15.26,34.75 14.58,34.75 14.43,34.59 14.43,26.52 U1.25
  Bottom 0.152: v29.52,36.5 25.32,36.5 v25.02,36.2 | v17.78,36.2 17.78,37.03 13.21,41.6 2.69,41.6 JP2.1
USB_EN
  Top 0.152: R2.2 7.34,3.52 7.34,4.57 USB_EN.TP 7.57,4.57 8.41,5.41 8.41,8.38 7.84,8.95 | 7.84,8.95 7.8,8.99 3,8.99 2.69,8.69 JP2.14 | U1.32 14.35,22.94 13.51,22.94 7.87,17.3 7.87,8.99 7.84,8.95
USB_ID
  Top 0.152: R2.1 7.54,1.6 9.47,1.6 R1.2 9.55,1.52 10.39,1.52 10.62,1.29 12.06,1.29 12.56,1.79 | USB_ENABLER.1 11.3,3.73 11.3,2.82 USB_ENABLER.2 11.38,2.82 11.53,2.82 12.56,1.79 | 12.56,1.79 13.06,1.29 14.58,1.29 14.73,1.45 14.73,3.12 14.88,3.28 19.69,3.28 20.52,4.11 20.52,4.72 MICRO-USB.4
USB_N  (via drill 0.35)
  Top 0.152: v19.23,6.4 19.23,4.8 MICRO-USB.2 | v19,10.59 19,10.9 18.54,11.35 USB_ESD_PROTECTION.3 18.47,11.43 17.7,11.43 11.84,17.3 11.84,20.73 13.59,22.48 14.35,22.48 U1.33
  Bottom 0.152: v19.23,6.4 19.23,10.36 v19,10.59
USB_P
  Top 0.152: MICRO-USB.3 19.91,4.8 19.91,6.63 19.61,6.93 19.61,10.36 20.6,11.35 USB_ESD_PROTECTION.2 20.37,11.2 15.49,16.08 15.49,21.64 15.19,21.95 14.43,21.95 U1.34
VBUS
  Top 0.254: 17.55,6.33 18.69,7.47 C1.1 18.77,7.54 18.77,9.22 18.54,9.45 USB_ESD_PROTECTION.4 18.39,9.52 17.17,10.74 16.56,10.74 D1.2 | 17.55,6.33 17.32,6.1 15.95,6.1 13.89,4.04 13.89,3.81 USB_ENABLER.5 | 17.55,6.33 18.62,5.26 18.62,4.8 MICRO-USB.1
VDDCORE
  Top 0.254: C13.2 18.09,16.54 18.09,17.68 18.85,18.44 18.85,19.43 U1.43
VIN  (via drill 0.35)
  Top 0.254: R1.1 9.47,3.28 9.47,4.5 VIN.TP 10.39,4.57 11.3,5.49 R3.1 | C4.2 9.63,7.62 VOLTAGE_REGULATOR.3 | R3.1 11.38,5.64 11.38,7.54 C4.2 | Q1.2 16.41,6.93 15.8,6.93 14.27,8.46 12.37,8.46 11.53,7.62 C4.2 | v12.45,3.05 12.45,3.89 11.15,5.18 R3.1
  Bottom 0.254: v12.45,3.05 27,3.05 32.11,8.15 32.11,9.07 32.94,9.91 37.29,9.91 38.12,10.74 38.12,39.55 36.37,41.3 36.37,41.6 JP1.1